# Altium PCB TPS40200BuckDesign.PcbDoc (part 2 of 2)
Units mil, origin at the board's own origin, x right, y up, seen from the top; angles counter-clockwise.
Board outline 3109.96 x 2273.62 mil, 2 copper layers (Top Layer, Bottom Layer), stack 62 mil thick; 37 components, 13 nets, 69 pads, 29 vias.
Unrouted connection lines stored in the file: 1.
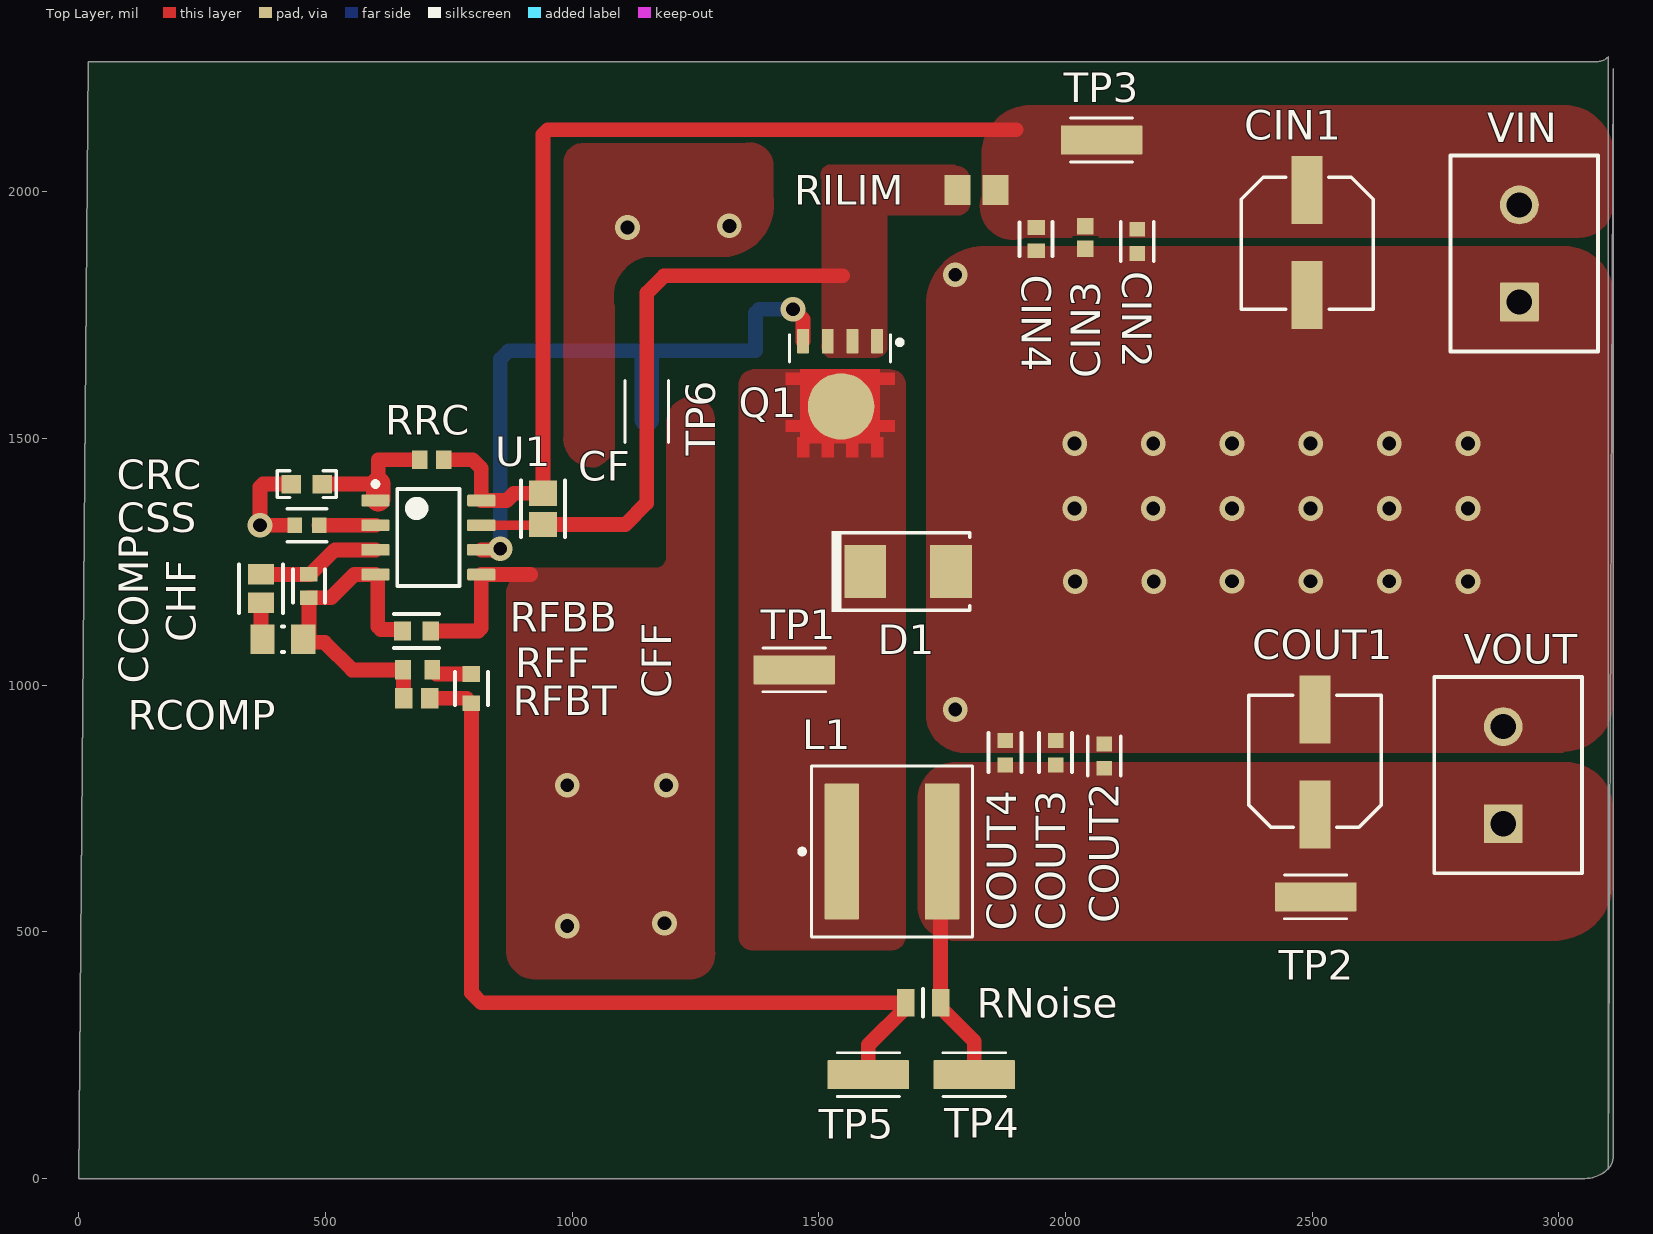
[diagram p0: Top Layer view]

## Silkscreen, mask and mechanical layers (free items; w line width, h text height) (continued)
M10 Fab Notes: (continued)
  text "1" at 11554.37,2055.73 h60
  text "3" at 12223.36,2055.72 h60
  text "X" at 10795.37,1909.54 h60
  text "RoHS" at 10923.37,1909.54 h60
  text "OTHER" at 11567.77,1909.54 h60
  text "PER ORDER" at 11964.82,1909.54 h60
  text "ALL BOARDS MUST MEET OR EXCEED UL94-V0 REQUIREMENTS." at 9648.4,1755.71 h60
  text "PCB MUST BEAR THE UL94V-0 UL REGISTERED MATERIAL ID NUMBER" at 9648.4,1639.65 h60
  text "ADDITIONAL REQUIREMENTS:" at 9620.86,1470.22 h60
  text "MICROSECTION:" at 9695.63,1363.1 h60
  text "YES" at 10601.36,1363.1 h60
  text "REQUIRED" at 11462.86,1218.76 h60
  text "BARE BOARD ELEC. TEST:" at 9695.63,1215.91 h60
  text "NONE" at 11001.36,1215.91 h60
  text "X" at 11344.87,1215.91 h60
  text "PER ORDER" at 12054.86,1215.91 h60
  text "XX MIL VIAS REQUIRE NON-CONDUCTIVE FILL AND PLANARIZE" at 9863.78,1010.96 h59
  text "XX MIL VIAS REQUIRE CONDUCTIVE FILL AND PLANARIZE" at 9871.78,906.98 h60
  text "OUTER XX MIL TRACES REQUIRE 50 OHM SINGLE-ENDED IMPEDANCE" at 9870.79,743.6 h58
  text "LAYER 2 & 3 (INNER LAYERS) XX MIL WIDE, XX MIL SPACE / TRACES REQUIRE 100 OHM DIFFERENTIAL IMPEDANCE" at 9862.79,507.89 h60
  text ".Layer_Name" at -1135.6,-1242.35 h60
M11 Gerber Information:
  lines w10: -2004.6,-1314.03 4595.4,-1314.03 ; -2004.6,-1110.69 4597.4,-1110.69 ; -2004.6,-907.36 -2004.6,-1517.36 2000.4,-1517.36 4597.4,-1517.36 4597.4,-907.36 -2004.1,-907.36 -2004.1,-1517.36 -428.6,-1517.36 ; 460.4,-1517.36 460.4,-907.36 ; 1727.4,-1110.69 1727.4,-907.36 ; 2567.4,-1110.69 2567.4,-907.36 ; 3189.4,-1523.86 3189.4,-1321.03
  text "ALL ARTWORK VIEWED FROM TOP SIDE" at -1941.1,-1039.53 h60
  text "BOARD #:" at 535.4,-1039.53 h60
  text ".PRJ_Number" at 1080.9,-1039.53 h60
  text "REV:" at 1925.4,-1039.53 h60
  text ".PCB_Rev" at 2216.9,-1039.53 h60
  text "SVN REV:" at 2763.4,-1039.53 h60
  text ".VersionControl_RevNumber" at 3269.4,-1039.53 h60
  text "LAYER NAME =" at -1941.1,-1242.35 h60
  text "TID #:" at 535.4,-1242.86 h60
  text ".TID" at 1080.9,-1242.86 h60
  text "PLOT NAME =" at -1941.1,-1448.19 h60
  text ".plot_File_Name" at -1135.6,-1448.19 h60
  text "GENERATED    :" at 537.4,-1448.19 h60
  text ".Print_Date" at 1406.9,-1448.19 h60
  text ".Print_Time" at 2135.9,-1448.19 h60
  text "TEXAS INSTRUMENTS" at 3400.4,-1448.19 h60
M12 Stackup:
  drawing of 191 lines, arcs and shapes, not listed
  text "Layer" at 8109,7491.08 h60
  text "Name" at 8518.91,7491.08 h60
  text "Material" at 9448.65,7491.08 h60
  text "Thickness" at 10308.42,7491.08 h60
  text "Constant" at 10958.26,7491.08 h60
  text "Board Layer Stack" at 11528.12,7491.08 h60
  text "Top Overlay" at 8518.91,7371.08 h60
  text "Top Solder" at 8518.91,7251.08 h60
  text "Solder Resist" at 9448.65,7251.08 h60
  text "0.40mil" at 10308.42,7251.08 h60
  text "3.5" at 10958.26,7251.08 h60
  text "1" at 8109,7131.08 h60
  text "Top Layer" at 8518.91,7131.08 h60
  text "1.40mil" at 10308.42,7131.08 h60
  text "Dielectric1" at 8518.91,7011.08 h60
  text "FR-4 High Tg" at 9448.65,7011.08 h60
  text "59.20mil" at 10308.42,7011.08 h60
  text "4.8" at 10958.26,7011.08 h60
  text "2" at 8109,6891.08 h60
  text "Bottom Layer" at 8518.91,6891.08 h60
  text "1.40mil" at 10308.42,6891.08 h60
  text "Bottom Solder" at 8518.91,6771.08 h60
  text "Solder Resist" at 9448.65,6771.08 h60
  text "0.40mil" at 10308.42,6771.08 h60
  text "3.5" at 10958.26,6771.08 h60
  text "Bottom Overlay" at 8518.91,6651.08 h60
  text ".Layer_Name" at -1135.6,-1242.35 h60
M13 Component Bodies Top:
  text ".Layer_Name" at -1135.6,-1242.35 h60
M14 Component Bodies Bottom:
  text ".Layer_Name" at -1135.6,-1242.35 h60
M15 Courtyards Top:
  text ".Layer_Name" at -1135.6,-1242.35 h60
M16 Courtyards Bottom:
  text ".Layer_Name" at -1135.6,-1242.35 h60
Drill Drawing:
  lines w10: 3623.49,2754.48 3678.75,2754.48 3678.75,2809.73 3623.49,2809.73 3623.49,2754.48 ; 3623.49,2934.05 3678.75,2934.05 3651.12,2878.8 3623.49,2934.05
  lines w12: 3573.4,2717.18 6804.89,2717.18 ; 3573.4,2965.82 6804.89,2965.82 ; 3911.26,2592.86 3911.26,3090.14 ; 4243.26,2592.86 4243.26,3090.14 ; 4879.83,2592.86 4879.83,3090.14 ; 5138.97,2592.86 5138.97,3090.14 ; 5514.13,2592.86 5514.13,3090.14 ; 6238.46,2592.86 6238.46,3090.14 ; 3573.4,2592.86 6804.89,2592.86 6804.89,3090.14 3573.4,3090.14 3573.4,2592.86
  text "Symbol" at 3647.99,3003.12 h72
  text "Quantity" at 3948.56,3003.12 h72
  text "Finished Hole Size" at 4280.56,3003.12 h72
  text "Plated" at 4917.12,3003.12 h72
  text "Hole Type" at 5176.26,3003.12 h72
  text "Drill Layer Pair" at 5551.42,3003.12 h72
  text "Hole Tolerance" at 6275.75,3003.12 h72
  text "29" at 3948.56,2878.8 h60
  text "28.00mil (0.711mm)" at 4280.56,2878.8 h60
  text "PTH" at 4917.12,2878.8 h60
  text "Round" at 5176.26,2878.8 h60
  text "Top Layer - Bottom Layer" at 5551.42,2878.8 h60
  text "4" at 3948.56,2754.48 h60
  text "51.18mil (1.300mm)" at 4280.56,2754.48 h60
  text "PTH" at 4917.12,2754.48 h60
  text "Round" at 5176.26,2754.48 h60
  text "Top Layer - Bottom Layer" at 5551.42,2754.48 h60
  text "33 Total" at 3948.56,2630.16 h60
  text ".Layer_Name" at -1135.6,-1242.35 h60
M17 Embedded Cavity:
  text ".Layer_Name" at -1135.6,-1242.35 h60
M18 Embedded Assembly:
  text ".Layer_Name" at -1135.6,-1242.35 h60
M19 Embedded Keepout:
  text ".Layer_Name" at -1135.6,-1242.35 h60

## Dimensions
-1712.6,-783.86 to -712.6,-783.86 on M2 Board Dimensions
-1712.6,-383.86 to 3100.39,19.68 on M2 Board Dimensions
-1712.6,-383.86 to 3100.39,2273.62 on M2 Board Dimensions

## Text inside footprints (layer, text, board x,y; h text height)
ZZ1: M5 Assembly Top "Install label in silkscreened box after final wash.  Text shall be 8 pt font.  Text shall be per the Label Table in the PDF schematic." at -1482.6,3534.14 h40